# EAGLE board stm32103c8t6-v4 (EAGLE 7.3.0)
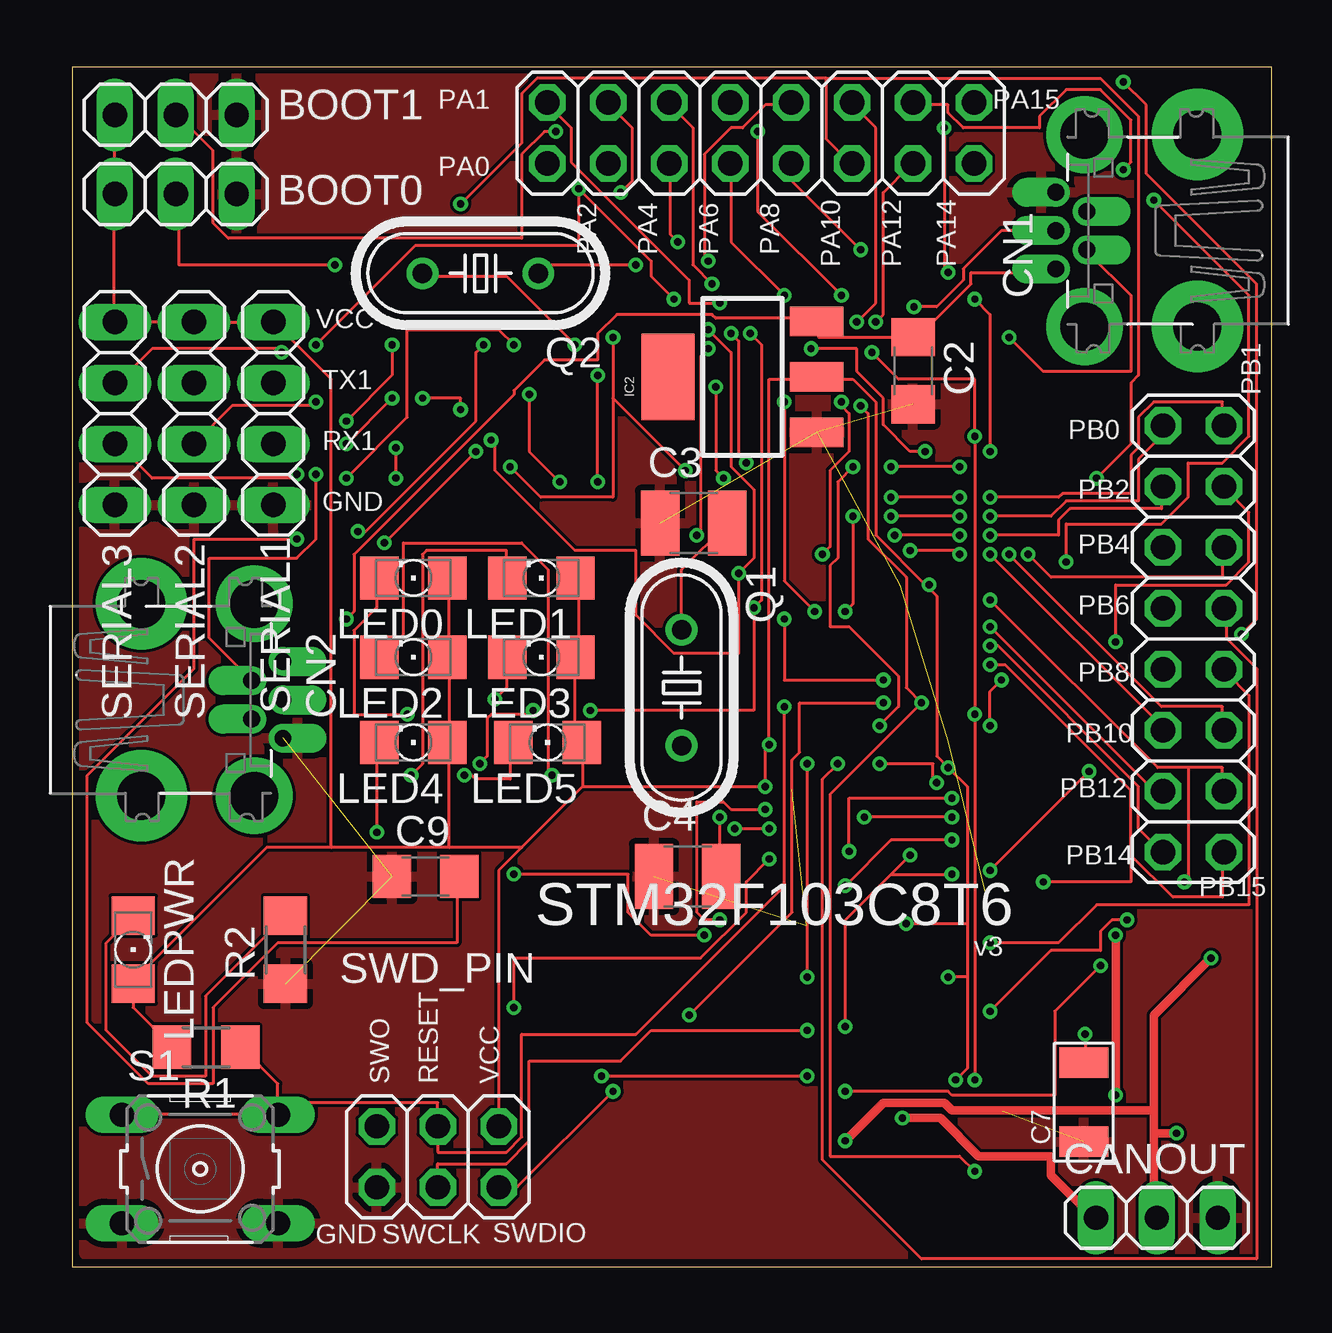
[diagram p0: board, top side]
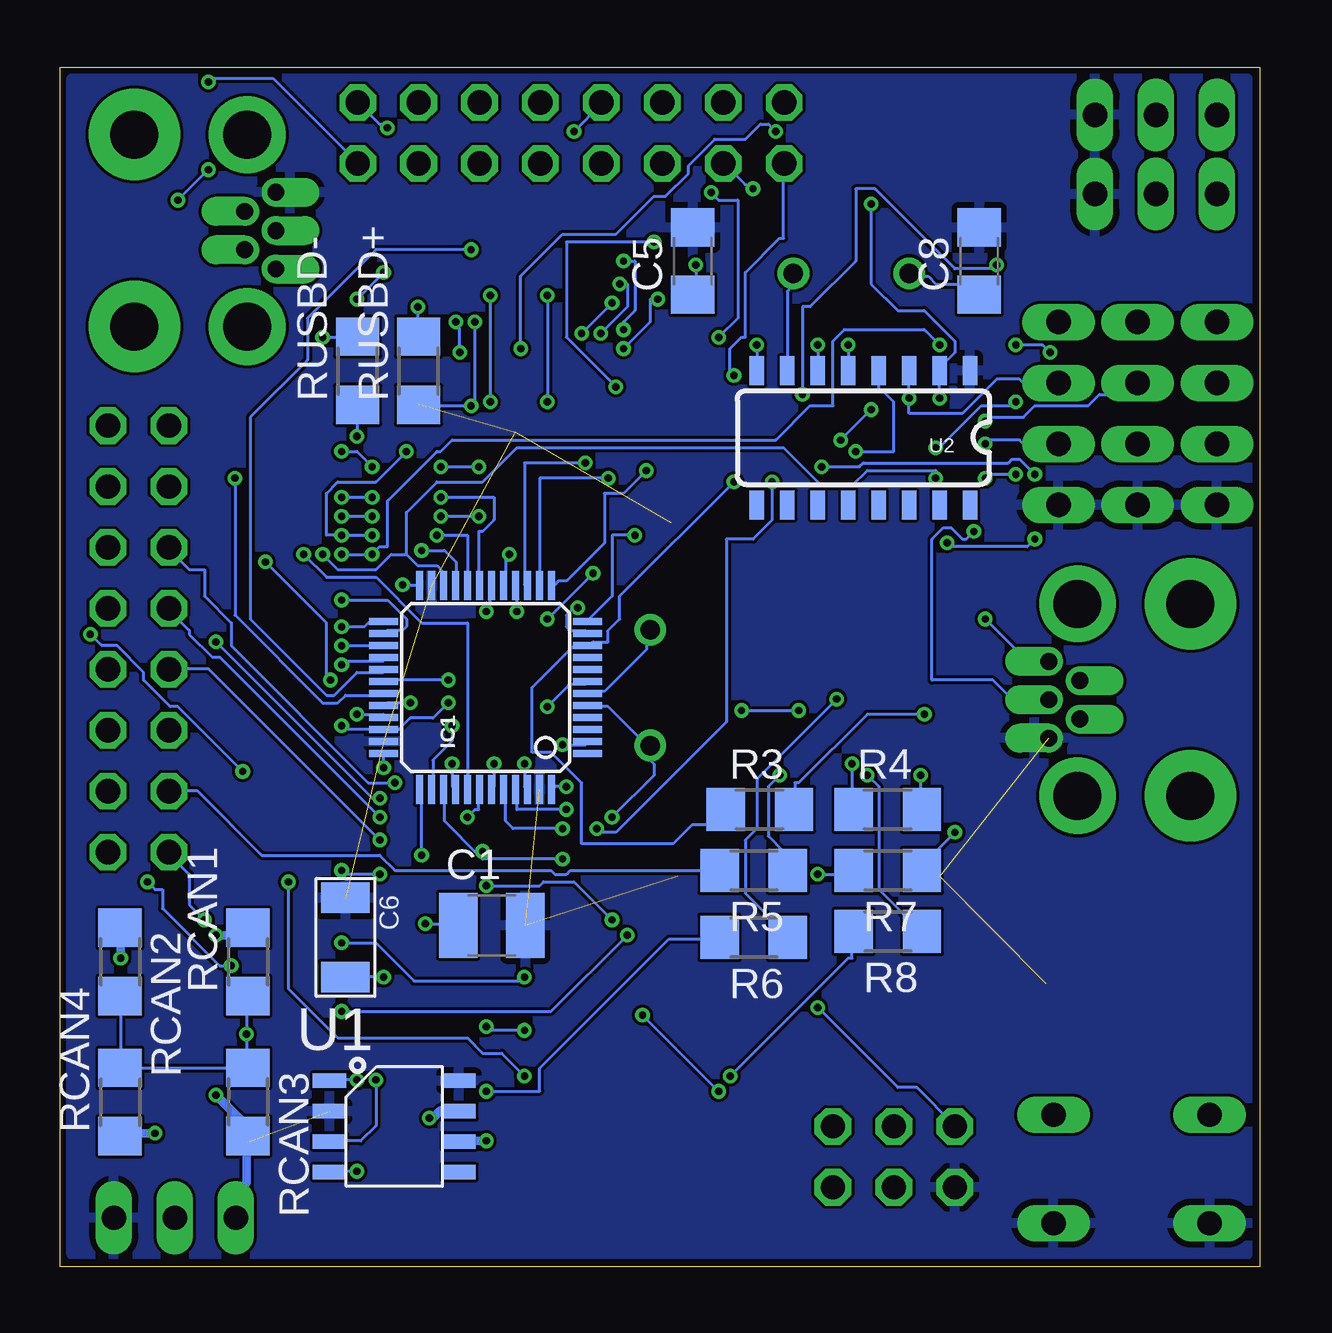
[diagram p1: board, bottom side, seen from below]

Size 50 x 50 mm. Coordinates in mm from the lower left corner, seen from the top.
Outline: 0,0 50,0 50,50 0,50 0,0
Copper layers (1*16): Top 0.035mm / dielectric 1.5mm / Bottom 0.035mm
Design rules "dirt_cheap_dirty_boards.v1": minimum track width 5mil, minimum drill 12mil, track to track 5mil, track to pad 5mil, pad to pad 5mil, via to via 5mil, smd to smd 0mil, copper to edge 10mil, drill to drill 10mil, minimum pad ring 10mil, minimum via ring 6mil, stop-mask expansion 2mil, vias tented up to drill 25mil, thermal gap 10mil
Net classes: 3 CAN: width 0.356 mm

## Footprints (pad centres in the part's own frame; a part is rotated, then mirrored left to right if it is on the bottom)
1X03 = drill 1.016 long: 1 -2.54,0; 2 0,0; 3 2.54,0
C1210 = smd 1.6 x 2.7: 1 -1.4,0; 2 1.4,0
C1206 = smd 1.6 x 1.8: 1 -1.4,0; 2 1.4,0
C1206' = smd 1.27 x 2.032: 1 -1.651,0; 2 1.651,0
USB-MINIB-THM = drill 0.7 offset: D+ 0,9.8; D- -0.8,8.5; GND 1.6,9.8; ID 0.8,8.5; VBUS -1.6,9.8 | drill 2 pad 3.81: GND1 -4,3.9; GND4 4,3.9 | drill 2 pad 3.2: GND2 -4,8.6; GND3 4,8.6
LQFP48 = smd 0.3 x 1.2: 1 -2.75,-4.25; 2 -2.25,-4.25; 3 -1.75,-4.25; 4 -1.25,-4.25; 5 -0.75,-4.25; 6 -0.25,-4.25; 7 0.25,-4.25; 8 0.75,-4.25; 9 1.25,-4.25; 10 1.75,-4.25; 11 2.25,-4.25; 12 2.75,-4.25; 25 2.75,4.25; 26 2.25,4.25; 27 1.75,4.25; 28 1.25,4.25; 29 0.75,4.25; 30 0.25,4.25; 31 -0.25,4.25; 32 -0.75,4.25; 33 -1.25,4.25; 34 -1.75,4.25; 35 -2.25,4.25; 36 -2.75,4.25 | smd 1.2 x 0.3: 13 4.25,-2.75; 14 4.25,-2.25; 15 4.25,-1.75; 16 4.25,-1.25; 17 4.25,-0.75; 18 4.25,-0.25; 19 4.25,0.25; 20 4.25,0.75; 21 4.25,1.25; 22 4.25,1.75; 23 4.25,2.25; 24 4.25,2.75; 37 -4.25,2.75; 38 -4.25,2.25; 39 -4.25,1.75; 40 -4.25,1.25; 41 -4.25,0.75; 42 -4.25,0.25; 43 -4.25,-0.25; 44 -4.25,-0.75; 45 -4.25,-1.25; 46 -4.25,-1.75; 47 -4.25,-2.25; 48 -4.25,-2.75
SOT223 = smd 1.219 x 2.235: 1 -2.311,-3.099; 2 0,-3.099; 3 2.311,-3.099 | smd 3.6 x 2.2: 4 0,3.099
1206 = smd 1.6 x 1.803: A -1.422,0; C 1.422,0
2X08 = drill 1.016 octagon: 1 -8.89,-1.27; 2 -8.89,1.27; 3 -6.35,-1.27; 4 -6.35,1.27; 5 -3.81,-1.27; 6 -3.81,1.27; 7 -1.27,-1.27; 8 -1.27,1.27; 9 1.27,-1.27; 10 1.27,1.27; 11 3.81,-1.27; 12 3.81,1.27; 13 6.35,-1.27; 14 6.35,1.27; 15 8.89,-1.27; 16 8.89,1.27
HC49/S = drill 0.813: 1 -2.413,0; 2 2.413,0
R1206 = smd 1.6 x 1.803: 1 -1.422,0; 2 1.422,0
B3F-10XX = drill 1.016 long: 1 -3.251,2.261; 2 3.251,2.261; 3 -3.251,-2.261; 4 3.251,-2.261
1X04 = drill 1.016 long: 1 -3.81,0; 2 -1.27,0; 3 1.27,0; 4 3.81,0
2X03 = drill 1.016 octagon: 1 -2.54,-1.27; 2 -2.54,1.27; 3 0,-1.27; 4 0,1.27; 5 2.54,-1.27; 6 2.54,1.27
SOIC8-6.0 = smd 0.6 x 1.4: 1 -1.905,-2.7; 2 -0.635,-2.7; 3 0.635,-2.7; 4 1.905,-2.7; 5 1.905,2.7; 6 0.635,2.7; 7 -0.635,2.7; 8 -1.905,2.7
SO016 = smd 0.6 x 1.2: 1 -4.445,-2.8; 2 -3.175,-2.8; 3 -1.905,-2.8; 4 -0.635,-2.8; 5 0.635,-2.8; 6 1.905,-2.8; 7 3.175,-2.8; 8 4.445,-2.8; 9 4.445,2.8; 10 3.175,2.8; 11 1.905,2.8; 12 0.635,2.8; 13 -0.635,2.8; 14 -1.905,2.8; 15 -3.175,2.8; 16 -4.445,2.8

## Placement (x,y rotation side)
BOOT0  [1X03]  4.32,44.7 0 top
BOOT1  [1X03]  4.32,48.01 0 top
C1  10nF  [C1210]  32,14.22 0 bottom
C2  10nF  [C1206]  35.05,37.34 270 top
C3  22pF  [C1210]  25.91,30.99 0 top
C4  22pF  [C1210]  25.65,16.26 0 top
C5  22pF  [C1206]  23.62,41.91 90 bottom
C6  100uF  [C1206']  38.1,13.72 270 bottom
C7  4.7uF  [C1206']  42.16,6.86 90 top
C8  22pF  [C1206]  11.68,41.91 90 bottom
C9  0.1uF  [C1206]  14.73,16.26 0 top
CANOUT  [1X03]  45.21,2.03 0 top
CN1  [USB-MINIB-THM]  50.8,43.18 90 top
CN2  [USB-MINIB-THM]  -1.02,23.62 270 top
IC1  STM32-M-48  [LQFP48]  32.26,24.13 90 bottom
IC2  [SOT223]  27.94,37.08 90 top
LED0  [1206]  14.22,28.7 180 top
LED1  [1206]  19.56,28.7 180 top
LED2  [1206]  14.22,25.4 180 top
LED3  [1206]  19.56,25.4 180 top
LED4  [1206]  14.22,21.84 180 top
LED5  [1206]  19.81,21.84 180 top
LEDPWR  [1206]  2.54,13.21 90 top
PORTA  [2X08]  28.7,47.24 0 top
PORTB  [2X08]  46.74,26.16 270 top
Q1  8MHz  [HC49/S]  25.4,24.13 270 top
Q2  12MHz  [HC49/S]  17.02,41.4 180 top
R1  10K  [R1206]  5.59,9.14 180 top
R2  10K  [R1206]  8.89,13.21 90 top
R3  10K  [R1206]  20.83,19.05 0 bottom
R4  10K  [R1206]  15.49,19.05 0 bottom
R5  10K  [R1206]  21.08,16.51 180 bottom
R6  10K  [R1206]  21.08,13.72 180 bottom
R7  10K  [R1206]  15.49,16.51 180 bottom
R8  10K  [R1206]  15.49,13.97 180 bottom
RCAN1  1K5  [R1206]  42.16,12.7 90 bottom
RCAN2  1K5  [R1206]  47.5,12.7 270 bottom
RCAN3  61  [R1206]  42.16,6.86 270 bottom
RCAN4  61  [R1206]  47.5,6.86 90 bottom
RUSBD+  22R  [R1206]  35.05,37.34 90 bottom
RUSBD-  22R  [R1206]  37.59,37.34 90 bottom
S1  [B3F-10XX]  5.33,4.06 0 top
SERIAL1  [1X04]  8.38,35.56 90 top
SERIAL2  [1X04]  5.08,35.56 90 top
SERIAL3  [1X04]  1.78,35.56 90 top
SWD_PIN  [2X03]  15.24,4.57 180 top
U1  MCP2551-SOIC8  [SOIC8-6.0]  36.07,5.84 270 bottom
U2  SN74HC251_SMD  [SO016]  16.51,34.54 180 bottom

## Library data of the parts
BOOT0 BOOT1 CANOUT PORTA PORTB SERIAL1-SERIAL3 SWD_PIN = pinhead
C1-C5 C8 C9 = rcl
C6 C7 = Discrete
CN1 CN2 = adafruit
IC1 = pel_stm32
IC2 = SparkFun-PowerIC
LED0 LED1-LED5 LEDPWR = led
Q1 Q2 = crystal; OC_FARNELL: 1667008; OC_NEWARK: unknown
R1-R8 RCAN1-RCAN4 RUSBD+ RUSBD- = resistor
S1 = switch-omron; MPN: B3F-1000; OC_FARNELL: 176432; OC_NEWARK: 36M3542
U1 = IC
U2 = SparkFun-DigitalIC

## Nets
BOOT0: BOOT0.2 IC1.44
BOOT1: BOOT1.2 IC1.20 PORTB.3
CANH [CAN]: CANOUT.1 RCAN1.2 RCAN3.2 U1.7
CANL [CAN]: CANOUT.2 RCAN2.1 RCAN4.1 U1.6
CANRX: IC1.32 PORTA.12 RUSBD+.1 U1.4
CANTX: IC1.33 PORTA.13 RUSBD-.1 U1.1
D+: CN1.D+ RUSBD+.2
D+CHG: CN2.D+ U2.5
D-: CN1.D- RUSBD-.2
D-CHG: CN2.D- U2.6
GND [GND]: BOOT0.3 BOOT1.3 C1.2 C2.2 C3.1 C4.1 C5.2 C6.1 C7.1 C8.2 C9.1 CANOUT.3 CN1.GND CN2.GND IC1.23 IC1.35 IC1.47 IC2.1 R2.1 S1.3 S1.4 SERIAL1.1 SERIAL2.1 SERIAL3.1 SWD_PIN.6 U1.2 U1.8 U2.1
N$1: IC2.4
N$2: LED0.C R3.2
N$3: LED1.C R4.2
N$4: LEDPWR.C R2.2
N$5: IC1.3
N$6: LED2.C R5.1
N$7: LED3.C R6.1
N$8: LED4.C R7.1
N$9: LED5.C R8.1
N$11: C9.2 U2.4
N$13: CN2.ID
OSCIN: C4.2 IC1.5 Q1.2
OSCOUT: C3.2 IC1.6 Q1.1
PA0: IC1.10 PORTA.1 R3.1
PA1: IC1.11 PORTA.2 R4.1
PA4: IC1.14 PORTA.5
PA5: IC1.15 PORTA.6
PA6: IC1.16 PORTA.7
PA7: IC1.17 PORTA.8
PA8: IC1.29 PORTA.9
PA15: IC1.38 PORTA.16
PB0: IC1.18 PORTB.1
PB1: IC1.19 PORTB.2
PB4: IC1.40 PORTB.5
PB5: IC1.41 PORTB.6
PB6: IC1.42 PORTB.7
PB7: IC1.43 PORTB.8
PB8: IC1.45 PORTB.9
PB9: IC1.46 PORTB.10
PB10: IC1.21 PORTB.11 SERIAL2.3
PB12: IC1.25 PORTB.13 R5.2
PB13: IC1.26 PORTB.14 R6.2
PB14: IC1.27 PORTB.15 R7.2
PB15: IC1.28 PORTB.16 R8.2
RESET: IC1.7 R1.1 S1.1 S1.2 SWD_PIN.3
RX1: IC1.31 PORTA.11 SERIAL1.2 U2.2
RX2: IC1.13 PORTA.4 SERIAL3.2
RX3: IC1.22 PORTB.12 SERIAL2.2
SWCLK: IC1.37 PORTA.15 SWD_PIN.4
SWDIO: IC1.34 PORTA.14 SWD_PIN.2
SWO: IC1.39 PORTB.4 SWD_PIN.5
TX1: IC1.30 PORTA.10 SERIAL1.3 U2.3
TX2: IC1.12 PORTA.3 SERIAL3.3
UNIC: C7.2 RCAN1.1 RCAN2.2 RCAN3.1 RCAN4.2
VBUS: C2.1 CN1.VBUS CN2.VBUS IC2.3
VCC [POWER]: BOOT0.1 BOOT1.1 C1.1 C6.2 IC1.2 IC1.24 IC1.36 IC1.48 IC2.2 LED0.A LED1.A LED2.A LED3.A LED4.A LED5.A LEDPWR.A R1.2 SERIAL1.4 SERIAL2.4 SERIAL3.4 SWD_PIN.1 U1.3
VCCINT [POWER]: U2.16
XI7: C5.1 Q2.1 U2.7
XI8: C8.1 Q2.2 U2.8

## Tracks (layer width: path | path; a pad name or v marks a point on that pad's centre or on a via)
BOOT0  (via drill 0.3)
  Top 0.127: v27.62,18.26 v29.05,18.26 | v20.32,32.7 19.05,33.97 v19.05,36.35 | v10.95,41.75 4.45,41.75 4.45,44.61 BOOT0.2
  Bottom 0.127: v29.05,18.26 31.11,18.26 31.43,18.57 31.43,19.84 IC1.44 | v27.62,18.26 27.46,18.1 26.83,18.1 22.23,22.7 22.23,30.32 21.11,30.32 20.32,31.11 v20.32,32.7 | v19.05,36.35 19.05,40.01 18.73,40.01 16.83,41.91 16.83,44.93 16.03,44.93 12.7,41.59 11.11,41.59 v10.95,41.75
BOOT1  (via drill 0.3)
  Top 0.127: v36.99,30.48 v34.29,30.48 | v38.26,30.48 41.12,30.48 41.12,31.11 41.59,31.59 45.4,31.59 45.4,32.38 PORTB.3 | v20.16,47.31 19.68,47.31 18.73,46.35 18.73,42.86 6.51,42.86 5.87,43.5 5.87,46.51 4.45,47.94 BOOT1.2 | v30.8,38.26 32.7,38.26 32.7,37.31 33.81,36.2 33.81,35.08 34.92,33.97 v35.56,33.97
  Bottom 0.127: v34.29,30.48 33.02,30.48 33.02,28.42 IC1.20 | v36.99,30.48 v38.26,30.48 38.89,30.48 38.89,32.23 38.42,32.7 36.83,32.7 v35.56,33.97 | v20.16,47.31 20.48,47.62 20.8,47.62 21.43,46.99 22.7,46.99 23.81,45.88 23.81,45.56 24.77,44.61 25.24,44.61 26.83,43.02 29.05,43.02 30.8,41.27 v30.8,38.26
CANH  (via drill 0.3)
  Top 0.356: v34.61,6.19 36.2,6.19 37.78,4.6 40.8,4.6 40.8,3.81 42.55,2.06 CANOUT.1 | v43.5,7.14 v43.5,13.81
  Bottom 0.356: v34.61,6.19 34.45,6.19 34.13,6.51 33.5,6.51 U1.7 | CANOUT.1 42.55,2.06 42.55,3.17 42.23,3.49 42.23,5.4 RCAN3.2 42.23,5.56 42.23,5.87 v43.5,7.14 | v43.5,13.81 42.39,13.81 42.23,13.97 RCAN1.2
CANL  (via drill 0.3)
  Top 0.356: v32.23,5.24 33.81,6.83 36.35,6.83 36.67,6.51 45.09,6.51 | 45.09,5.56 45.09,2.06 CANOUT.2 | 45.09,5.56 45.09,6.51 | 45.09,5.56 v46.04,5.56 | v47.47,12.86 45.09,10.48 45.09,6.51
  Bottom 0.356: v32.23,5.24 33.34,5.24 U1.6 | v46.04,5.56 47.47,5.56 RCAN4.1 | v47.47,12.86 47.47,13.97 RCAN2.1
CANRX  (via drill 0.3)
  Top 0.127: v32.86,35.88 33.18,35.56 33.18,30.32 34.77,28.73 34.77,24.13 v35.4,23.5 31.59,19.68 31.59,4.6 36.99,4.6 v37.62,3.97 | v32.7,39.37 33.5,40.16 33.5,47.47 32.54,48.42 PORTA.12
  Bottom 0.127: v35.4,23.5 36.35,23.5 IC1.32 | RUSBD+.1 34.92,35.88 v32.86,35.88 32.7,35.88 v32.7,39.37 | v37.62,3.97 38.73,3.97 U1.4
CANTX  (via drill 0.3)
  Top 0.127: v37.62,7.78 v37.62,23.02 v37.62,34.61 37.62,36.99 34.45,36.99 v33.34,38.1 | v33.5,39.37 33.81,39.69 33.81,44.77 34.92,45.88 PORTA.13
  Bottom 0.127: v37.62,23.02 36.51,23.02 IC1.33 | v37.62,34.61 37.62,35.88 RUSBD-.1 | v37.62,7.78 38.73,7.78 U1.1 | v33.5,39.37 33.34,39.21 v33.34,38.1
D+  (via drill 0.3)
  Top 0.127: v35.08,40.01 36.04,40.01 37.15,41.12 37.15,41.59 38.73,43.18 CN1.D+
  Bottom 0.127: v35.08,40.01 35.08,38.89 RUSBD+.2
D+CHG  (via drill 0.3)
  Top 0.127: v17.14,38.42 16.83,38.1 16.83,35.24 12.22,30.64 v11.91,30.64
  Bottom 0.127: v17.14,38.42 U2.5 | v11.91,30.64 12.22,30.32 12.38,30.32 12.86,30.8 13.18,30.8 13.65,30.32 13.65,24.45 11.11,24.45 10.32,23.65 8.89,23.65 CN2.D+
D-  (via drill 0.3)
  Top 0.127: v39.05,38.73 40.48,37.31 44.13,37.31 44.13,40.48 42.39,42.23 CN1.D-
  Bottom 0.127: v39.05,38.73 37.62,38.73 RUSBD-.2
D-CHG  (via drill 0.3)
  Top 0.127: v18.41,38.42 17.78,39.05 13.97,39.05 13.97,35.4 v11.43,32.86 | v10.16,33.02 10.16,30.32 9.37,29.53 5.71,29.53 5.71,26.19 7.46,24.45 CN2.D-
  Bottom 0.127: v18.41,38.42 U2.6 | v11.43,32.86 11.27,33.02 v10.16,33.02
GND  (10 unrouted)
  pour Bottom: 0.51,0.51 49.53,0.51 49.53,49.53 0.51,49.53
  pour Top: 0.51,0.51 0.51,49.53 49.53,49.53 49.53,0.51
N$2  (via drill 0.3)
  Top 0.127: v13.97,23.02 11.75,23.02 11.75,26.51 12.7,27.46 12.7,28.57 LED0.C
  Bottom 0.127: v13.97,23.02 16.35,23.02 19.21,20.16 19.37,20.16 19.37,19.05 R3.2
N$3  (via drill 0.3)
  Top 0.127: v14.13,20.48 14.61,20.95 14.61,29.69 14.76,29.84 18.1,29.84 18.1,28.73 LED1.C
  Bottom 0.127: v14.13,20.48 14.13,19.05 R4.2
N$4
  Top 0.127: LEDPWR.C 2.54,14.61 1.43,13.49 1.43,9.84 3.33,7.94 5.56,7.94 5.56,11.27 8.89,14.61 R2.2
N$6  (via drill 0.3)
  Top 0.127: v20,20.48 19.84,20.64 19.84,29.05 18.73,30.16 13.81,30.16 13.81,26.35 12.86,25.4 LED2.C
  Bottom 0.127: v20,20.48 20.48,20 20.48,17.94 19.84,17.3 19.68,17.3 19.68,16.51 R5.1
N$7  (via drill 0.3)
  Top 0.127: v17.62,23.65 18.1,24.13 18.1,25.4 LED3.C
  Bottom 0.127: v17.62,23.65 20.95,20.32 20.95,18.26 21.43,17.78 21.43,15.56 19.68,13.81 R6.1
N$8  (via drill 0.3)
  Top 0.127: v12.7,18.1 12.7,21.75 LED4.C
  Bottom 0.127: v12.7,18.1 13.49,17.3 13.97,17.3 13.97,16.51 R7.1
N$9  (via drill 0.3)
  Top 0.127: v16.35,20.48 16.67,20.48 16.83,20.32 18.26,20.32 18.26,21.75 LED5.C
  Bottom 0.127: v16.35,20.48 15.88,20 15.88,15.72 14.13,13.97 R8.1
N$11  (via drill 0.3)
  Top 0.127: v13.02,30.16 v16.83,33.97 | v9.37,30.32 5.08,30.32 5.08,24.92 0.64,20.48 0.64,10.16 3.17,7.62 5.87,7.62 5.87,10.79 8.57,13.49 16.03,13.49 16.03,16.19 C9.2
  Bottom 0.127: U2.4 15.88,36.51 15.72,36.51 15.24,36.04 15.24,33.97 v16.83,33.97 | v13.02,30.16 12.86,30 9.68,30 v9.37,30.32
OSCIN  (via drill 0.3)
  Top 0.127: v26.99,18.73 26.99,16.35 C4.2
  Bottom 0.127: IC1.5 27.94,23.34 27.15,23.34 25.56,21.75 25.4,21.75 Q1.2 25.4,21.11 25.24,20.95 25.24,20.48 v26.99,18.73
OSCOUT
  Top 0.127: Q1.1 25.4,29.05 27.3,30.96 C3.2
  Bottom 0.127: IC1.6 27.94,23.97 27.3,23.97 25.56,25.72 25.56,26.51 25.4,26.51 Q1.1
PA0  (via drill 0.3)
  Top 0.127: v21.91,32.7 v21.91,37.15
  Bottom 0.127: R3.1 22.38,19.05 23.02,18.41 23.65,18.41 24.45,17.62 28.26,17.62 28.26,20.16 29.53,21.43 30.32,21.43 30.32,24.13 28.57,25.88 28.1,25.88 IC1.10 27.94,25.88 27.78,26.04 27.15,26.04 27.15,26.51 26.67,26.99 26.67,27.94 v21.91,32.7 | v21.91,37.15 22.07,37.15 22.07,38.26 21.59,38.73 21.43,38.73 21.43,41.43 20,42.86 19.84,42.86 19.84,45.88 PORTA.1
PA1  (via drill 0.3)
  Top 0.127: v28.26,38.89 28.73,38.42 28.73,27.78 v28.42,27.46 28.42,23.18 v21.59,23.18 | v26.99,40.16 25.72,40.16 25.72,41.12 20.8,46.04 20.8,47.47 19.84,48.42 PORTA.2 | v16.99,20.95 17.3,21.27 17.3,22.86 17.46,23.02 19.21,23.02 v19.21,23.18
  Bottom 0.127: v28.42,27.46 28.57,27.46 28.89,27.15 28.89,26.67 28.73,26.51 28.1,26.51 IC1.11 | v26.99,40.16 v28.26,38.89 | v16.99,20.95 16.99,19.05 R4.1 | v21.59,23.18 v19.21,23.18
PA4  (via drill 0.3)
  Top 0.127: v27.15,32.86 26.83,33.18 v26.83,36.67 | v25.24,42.7 24.92,43.02 24.92,45.88 PORTA.5
  Bottom 0.127: v27.15,32.86 30,32.86 30,28.42 IC1.14 | v26.83,36.67 28.89,38.73 28.89,42.7 v25.24,42.7
PA5  (via drill 0.3)
  Top 0.127: v28.1,33.5 27.78,33.81 27.78,38.58 v27.46,38.89 | v26.67,40.96 25.88,41.75 25.88,47.47 24.92,48.42 PORTA.6
  Bottom 0.127: v28.1,33.5 30.64,33.5 30.64,28.42 IC1.15 | v27.46,38.89 26.35,40.01 26.35,40.96 v26.67,40.96
PA6  (via drill 0.3)
  Top 0.127: v30.96,27.3 29.69,28.57 v29.69,36.04 | v29.69,40.48 27.46,42.7 27.46,45.88 PORTA.7
  Bottom 0.127: v30.96,27.3 30.96,28.26 IC1.16 | v29.69,40.48 v29.69,36.04
PA7  (via drill 0.3)
  Top 0.127: v31.27,29.69 31.59,30 31.59,33.18 32.38,33.97 32.38,35.56 32.07,35.88 v32.07,36.04 | v32.07,40.48 28.57,43.97 v28.57,47.31
  Bottom 0.127: v31.27,29.69 31.43,29.69 31.43,28.42 IC1.17 | v32.07,40.48 v32.07,36.04 | v28.57,47.31 27.46,48.42 PORTA.8
PA8  (via drill 0.3)
  Top 0.127: v32.86,42.39 30,45.24 30,45.88 PORTA.9
  Bottom 0.127: v32.86,42.39 36.83,42.39 39.69,39.53 39.69,37.78 42.07,35.4 42.07,26.99 38.89,23.81 38.58,23.81 37.62,24.77 36.51,24.77 IC1.29
PA15  (via drill 0.3)
  Top 0.127: v33.66,22.54 34.45,23.34 34.45,24.61 32.38,26.67 31.59,26.67 31.59,29.21 31.91,29.53 31.91,32.7 v32.54,33.34 | v36.99,33.34 v34.13,33.34 | v38.26,33.97 38.26,39.69 v37.62,40.32 | v36.51,41.43 36.35,41.59 v36.35,47.47
  Bottom 0.127: v33.66,22.54 33.66,21.91 34.45,21.11 34.45,20 IC1.38 | v34.13,33.34 v32.54,33.34 | v36.99,33.34 37.62,33.97 v38.26,33.97 | v36.51,41.43 v37.62,40.32 | v36.35,47.47 36.51,47.62 36.67,47.62 37.47,48.42 PORTA.16
PB0  (via drill 0.3)
  Top 0.127: v32.23,27.3 32.54,27.62 v32.54,31.27 | v36.99,31.27 v34.13,31.27 | v38.26,31.27 40.8,31.27 41.43,31.91 44.45,31.91 44.45,33.66 45.4,34.61 45.4,34.92 PORTB.1
  Bottom 0.127: v32.23,27.3 32.07,27.3 32.07,28.26 IC1.18 | v34.13,31.27 v32.54,31.27 | v38.26,31.27 v36.99,31.27
PB1  (via drill 0.3)
  Top 0.127: v36.99,32.07 v34.13,32.07 | v38.26,32.07 41.12,32.07 41.27,32.23 44.13,32.23 44.13,33.81 44.45,34.13 44.45,35.4 45.09,36.04 47.94,36.04 47.94,35.08 PORTB.2
  Bottom 0.127: v34.13,32.07 31.91,32.07 31.91,31.11 32.38,30.64 32.54,30.64 32.54,28.42 IC1.19 | v38.26,32.07 v36.99,32.07
PB4  (via drill 0.3)
  Top 0.127: v33.66,20.95 35.88,20.95 35.88,20.32 v36.04,20.16
  Bottom 0.127: v33.66,20.95 33.66,20 IC1.40 | v36.04,20.16 37.15,20.16 42.86,25.88 42.86,26.83 43.97,27.94 43.97,29.05 44.61,29.05 45.4,29.84 PORTB.5
PB5  (via drill 0.3)
  Top 0.127: v39.85,29.69 40.8,28.73 47.94,28.73 47.94,29.84 PORTB.6
  Bottom 0.127: v39.85,29.69 38.89,28.73 36.83,28.73 34.92,26.83 33.02,26.83 33.02,20 IC1.41
PB6  (via drill 0.3)
  Top 0.127: v36.67,18.73 v33.02,18.73
  Bottom 0.127: v33.02,18.73 32.7,19.05 32.54,19.05 32.54,19.84 IC1.42 | v36.67,18.73 43.34,25.4 43.66,25.4 44.61,26.35 44.61,26.51 45.4,27.3 PORTB.7
PB7  (via drill 0.3)
  Top 0.127: v31.91,20.95 31.27,20.32 31.27,4.45 35.4,0.32 49.37,0.32 49.37,24.92 48.1,26.19 48.1,27.3 PORTB.8
  Bottom 0.127: v31.91,20.95 31.91,20 IC1.43
PB8  (via drill 0.3)
  Top 0.127: v28.89,19.05 27.46,19.05 27.15,19.37 26.04,19.37 26.04,14.76 26.35,14.45 v26.99,14.45 | v32.23,15.88 34.13,17.78 v36.67,17.78
  Bottom 0.127: v28.89,19.05 30.96,19.05 30.96,19.84 IC1.45 | v26.99,14.45 28.57,16.03 29.84,16.03 30,15.88 v32.23,15.88 | v36.67,17.78 43.81,24.92 45.4,24.92 PORTB.9
PB9  (via drill 0.3)
  Top 0.127: v30.64,12.06 v30.64,20.95 | v38.26,13.49 41.12,13.49 42.7,15.08 49.05,15.08 49.05,23.81 48.1,24.77 PORTB.10
  Bottom 0.127: v30.64,20.95 30.64,20 IC1.46 | v30.64,12.06 30.8,11.91 35.24,11.91 36.83,13.49 v38.26,13.49
PB10  (via drill 0.3)
  Top 0.127: v34.92,29.84 36.99,29.84 v36.99,29.69 | v38.26,29.69 45.4,22.54 45.4,22.38 PORTB.11 | v11.43,35.24 13.34,37.15 v13.34,38.42
  Bottom 0.127: v34.92,29.84 33.97,29.84 33.5,29.37 33.5,28.42 IC1.21 | v38.26,29.69 v36.99,29.69 36.67,30 36.35,30 36.35,31.91 34.29,33.97 34.13,33.97 33.66,34.45 20.16,34.45 18.73,35.88 17.78,35.88 17.78,38.58 17.3,39.05 13.97,39.05 v13.34,38.42 | SERIAL2.3 5.56,36.35 6.67,36.35 7.14,35.88 9.37,35.88 9.84,35.4 11.27,35.4 v11.43,35.24
PB12  (via drill 0.3)
  Top 0.127: v38.26,26.67 45.09,19.84 45.4,19.84 PORTB.13
  Bottom 0.127: v38.26,26.67 37.31,26.67 37.15,26.83 36.51,26.83 IC1.25 | R5.2 28.73,16.51 28.89,16.35 29.37,16.35 29.53,16.51 36.04,16.51 36.67,17.14 41.59,17.14 44.29,19.84 45.4,19.84 PORTB.13
PB13  (via drill 0.3)
  Top 0.127: v38.26,27.78 45.24,20.8 46.51,20.8 | 46.51,20.8 47.94,20.8 47.94,19.84 PORTB.14 | v32.23,7.3 36.51,7.3 36.67,7.14 40.96,7.14 40.96,10.64 v42.86,12.54 | v46.35,16.03 46.51,16.19 46.51,20.8
  Bottom 0.127: v38.26,27.78 36.35,27.78 35.56,26.99 35.56,26.67 35.72,26.51 36.35,26.51 IC1.26 | v32.23,7.3 30,7.3 30,8.26 24.61,13.65 22.54,13.65 R6.2 | v42.86,12.54 43.34,12.54 45.72,14.92 45.72,15.72 46.04,15.72 v46.35,16.03
PB14  (via drill 0.3)
  Top 0.127: v38.26,25.88 38.58,25.88 44.45,20 44.45,18.26 45.4,17.3 PORTB.15 | v18.41,16.35 23.18,16.35 23.18,14.76 24.13,13.81 v26.35,13.81 | v38.26,10.64 40.8,13.18 42.86,13.18 42.86,13.97 43.34,14.45 v43.97,14.45
  Bottom 0.127: v38.26,25.88 IC1.27 | v18.41,16.35 17.14,16.35 16.99,16.51 R7.2 | v26.35,13.81 29.53,10.64 v38.26,10.64 | v43.97,14.45 44.61,15.08 44.61,16.35 45.4,17.14 PORTB.15
PB15  (via drill 0.3)
  Top 0.127: v38.26,25.08 38.89,25.08 44.13,19.84 44.13,17.14 | 44.13,17.14 45.88,15.4 47.94,15.4 47.94,17.14 PORTB.16 | v30.64,7.94 v22.07,7.94 | v40.48,16.03 44.13,16.03 44.13,17.14
  Bottom 0.127: v38.26,25.08 38.1,25.24 36.51,25.24 IC1.28 | v22.07,7.94 17.14,12.86 16.99,12.86 16.99,13.97 R8.2 | v30.64,7.94 31.59,8.89 32.38,8.89 33.02,9.53 38.42,9.53 40.48,11.59 v40.48,16.03
RESET  (via drill 0.3)
  Top 0.127: 8.57,6.35 8.57,6.83 | 8.57,6.83 8.57,7.62 7.14,9.05 R1.1 | 8.57,6.35 2.22,6.35 S1.1 | 8.57,6.35 S1.2 8.57,6.83 | v29.69,23.34 29.69,15.88 23.5,9.68 18.73,9.68 18.73,5.4 18.1,4.76 15.24,4.76 SWD_PIN.3 15.24,6.83 8.57,6.83
  Bottom 0.127: v29.69,23.34 28.73,24.29 28.1,24.29 IC1.7
RX1  (via drill 0.3)
  Top 0.127: v11.43,34.29 v13.34,36.2 | v42.7,32.86 44.13,34.29 44.13,36.83 44.45,37.15 44.45,47.94 42.86,49.53 31.43,49.53 | 31.43,49.53 31.43,46.99 32.38,46.04 PORTA.11 | v16.19,44.29 18.73,46.83 18.73,48.9 19.37,49.53 31.43,49.53
  Bottom 0.127: v13.34,36.2 U2.2 13.34,37.47 12.7,38.1 12.7,38.58 13.97,39.85 15.08,39.85 16.19,40.96 v16.19,44.29 | v11.43,34.29 11.27,34.45 10,34.45 9.84,34.29 SERIAL1.2 | v42.7,32.86 42.7,27.15 39.05,23.5 38.42,23.5 38.1,23.81 36.51,23.81 IC1.31
RX2  (via drill 0.3)
  Top 0.127: 22.54,36.2 v25.56,33.18 | v22.54,38.73 22.54,36.2 | v22.86,44.77 23.34,45.24 23.34,47.47 22.38,48.42 PORTA.4 | v9.37,33.02 9.37,32.86 3.33,32.86 1.91,34.29 SERIAL3.2 | v18.26,33.34 19.53,32.07 22.54,32.07 22.54,36.2
  Bottom 0.127: v25.56,33.18 26.51,32.23 27.3,32.23 27.3,30.16 28.89,28.57 29.21,28.57 29.37,28.42 IC1.13 | v22.54,38.73 21.75,39.53 21.75,44.45 22.54,44.45 v22.86,44.77 | v9.37,33.02 10,33.66 10.32,33.66 10.48,33.5 16.51,33.5 16.67,33.34 v18.26,33.34
RX3  (via drill 0.3)
  Top 0.127: v39.05,29.69 45.4,23.34 47.94,23.34 47.94,22.38 PORTB.12 | SERIAL2.2 6.67,35.88 10.16,35.88 v10.16,36.04 | v13.49,32.86 v13.49,34.13
  Bottom 0.127: 35.56,29.69 35.08,29.21 34.29,29.21 33.97,28.89 33.97,28.42 IC1.22 | 35.56,29.69 36.2,29.69 36.83,29.05 38.42,29.05 v39.05,29.69 | v10.16,36.04 10.32,35.88 11.59,35.88 13.34,34.13 v13.49,34.13 | v13.49,32.86 13.49,33.18 16.35,33.18 16.99,32.54 18.26,32.54 19.84,34.13 30.96,34.13 32.38,32.7 34.29,32.7 35.56,31.43 35.56,29.69
SWCLK  (via drill 0.3)
  Top 0.127: 34.13,16.35 32.23,14.45 v32.23,10 | 34.13,16.35 v34.92,17.14 | v30.64,9.84 24.13,9.84 22.86,8.57 19.05,8.57 19.05,5.24 18.1,4.29 15.24,4.29 SWD_PIN.4 | v43.81,49.37 44.77,48.42 44.77,45.56 49.37,40.96 49.37,26.99 v48.74,26.35 | v38.26,16.51 v42.39,20.64 | 34.13,16.35 v36.67,16.35
  Bottom 0.127: v34.92,17.14 34.92,19.84 IC1.37 | v32.23,10 32.07,9.84 v30.64,9.84 | v43.81,49.37 43.66,49.53 41.12,49.53 37.62,46.04 PORTA.15 | v48.74,26.35 48.26,25.88 47.62,25.88 46.51,24.77 46.51,24.45 45.4,23.34 45.09,23.34 v42.39,20.64 | v38.26,16.51 38.1,16.35 v36.67,16.35
SWDIO  (via drill 0.3)
  Top 0.127: v33.81,23.5 30.32,23.5 30.32,21.43 30,21.11 30,14.76 v25.72,10.48 | v22.54,7.3 18.57,3.33 17.78,3.33 SWD_PIN.2 | v43.81,45.72 44.13,46.04 44.13,47.78 42.86,49.05 41.43,49.05 40.32,47.94 40.32,47.47 37.15,47.47 36.51,48.1 36.51,48.42 35.08,48.42 PORTA.14 | v45.09,44.45 49.05,40.48 49.05,34.61 47.94,33.5 46.51,33.5 46.51,32.07 45.4,30.96 41.43,30.96 v41.43,29.37 | v38.73,24.45 38.26,23.97 v38.26,22.54
  Bottom 0.127: v33.81,23.5 34.45,22.86 35.4,22.86 35.88,22.38 36.35,22.38 IC1.34 38.1,22.38 v38.26,22.54 | v22.54,7.3 v25.72,10.48 | v45.09,44.45 v43.81,45.72 | v41.43,29.37 38.89,26.83 38.89,24.45 v38.73,24.45
SWO  (via drill 0.3)
  Top 0.127: v29.05,16.99 28.1,16.03 28.1,14.76 26.19,12.86 18.41,12.86 v18.41,10.79 | v43.5,26.04 43.5,28.42 48.1,28.42 49.05,29.37 49.05,31.43 48.1,32.38 PORTB.4 | v36.67,19.53 32.38,19.53 v32.38,17.3
  Bottom 0.127: 32.54,17.14 32.38,16.99 v29.05,16.99 | 32.54,17.14 33.97,18.57 33.97,19.84 IC1.39 | v18.41,10.79 15.08,7.46 14.29,7.46 12.7,5.87 SWD_PIN.5 | v43.5,26.04 36.99,19.53 v36.67,19.53 | 32.54,17.14 v32.38,17.3
TX1  (via drill 0.3)
  Top 0.127: v33.81,24.45 29.69,24.45 v29.69,26.99 | v26.51,39.05 27.46,38.1 27.46,33.34 28.42,32.38 28.42,29.53 v27.78,28.89 27.78,25.56 25.08,25.56 23.5,27.15 23.5,29.84 20.95,29.84 17.62,33.18 17.62,34.29 v17.46,34.45 | v26.51,41.91 26.35,42.07 26.35,46.35 27.46,47.47 27.94,47.47 28.89,48.42 29.84,48.42 PORTA.10 | v14.61,36.2 16.19,36.2 v16.19,35.72
  Bottom 0.127: U2.3 v14.61,36.2 14.61,35.56 12.38,35.56 10.95,36.99 10,36.99 9.84,36.83 SERIAL1.3 | v33.81,24.45 36.35,24.45 IC1.30 | v27.78,28.89 v29.69,26.99 | v26.51,39.05 26.51,39.37 26.04,39.85 26.04,41.91 v26.51,41.91 | v17.46,34.45 v16.19,35.72
TX2  (via drill 0.3)
  Top 0.127: v26.04,30.48 26.19,30.64 26.19,37.94 v26.51,38.26 | v25.08,40.32 24.13,41.27 24.13,41.91 v21.11,44.93 21.11,42.55 14.29,42.55 v10.16,38.42 | v8.73,38.1 8.73,38.26 3.33,38.26 1.91,36.83 SERIAL3.3
  Bottom 0.127: v26.04,30.48 26.99,30.48 26.99,27.94 27.94,26.99 IC1.12 | v26.51,38.26 25.4,39.37 25.4,40.32 v25.08,40.32 | v21.11,44.93 21.27,45.09 21.43,45.09 22.23,45.88 PORTA.3 | v8.73,38.1 9.05,38.42 v10.16,38.42
UNIC  (via drill 0.3)
  Top 0.127: v42.23,9.68 42.23,8.57 C7.2
  Bottom 0.127: RCAN2.2 47.47,11.27 47.47,8.41 RCAN4.2 47.47,8.26 42.23,8.26 RCAN3.1 42.23,8.41 v42.23,9.68 42.23,11.27 RCAN1.1
VBUS  (via drill 0.3)
  Top 0.127: v11.43,26.99 11.75,27.3 11.75,29.69 18.41,36.35 18.41,36.51 19.68,37.78 21.91,37.78 21.91,38.89 22.7,39.69 26.67,39.69 26.83,39.53 30.96,39.53 IC2.3 31.11,39.37 31.11,38.73 34.92,38.73 C2.1 35.08,38.89 35.4,38.89 37.47,40.96 37.47,41.43 40.96,41.43 CN1.VBUS
  Bottom 0.127: v11.43,26.99 10.16,25.72 9.37,25.72 8.89,25.24 CN2.VBUS
VCC  (via drill 0.3)
  Top 0.127: 35.56,28.42 33.5,30.48 33.5,36.04 32.54,36.99 31.11,36.99 IC2.2 30.96,36.99 29.05,36.99 v29.05,21.75 28.89,21.59 v28.89,20 21.27,20 | 35.56,28.42 36.04,27.94 36.04,21.27 v36.51,20.8 37.31,20 37.31,14.29 | 35.56,28.42 v35.72,28.42 | v36.83,7.78 37.31,8.26 37.31,12.06 | 37.31,14.29 37.31,12.06 | 37.31,12.06 v36.51,12.06 | 37.31,14.29 v34.77,14.29 | BOOT1.1 1.75,47.94 1.75,44.77 BOOT0.1 1.75,44.61 1.75,39.37 SERIAL3.4 SERIAL2.4 SERIAL1.4 8.41,39.37 10.79,36.99 10.79,17.46 | 15.72,25.4 15.72,21.91 LED4.A 15.72,21.75 15.72,17.46 | 15.72,25.4 15.72,28.57 LED0.A | 15.72,25.4 LED2.A | R1.2 4.13,9.21 2.54,10.79 LEDPWR.A 2.54,11.91 8.1,17.46 10.79,17.46 | LED1.A 21.11,28.57 21.11,25.4 LED3.A 20.95,25.4 20.95,22.07 21.11,21.91 LED5.A 21.27,21.75 21.27,20 | SWD_PIN.1 17.78,16.51 18.73,17.46 | 21.27,20 18.73,17.46 | 18.73,17.46 15.72,17.46 | 15.72,17.46 10.79,17.46
  Bottom 0.127: v36.51,20.8 36.51,21.27 IC1.36 | v35.72,28.42 35.08,28.42 IC1.24 | v36.83,7.78 36.83,5.87 37.47,5.24 38.73,5.24 U1.3 | v36.51,12.06 C6.2 | v34.77,14.29 33.5,14.29 C1.1 | v28.89,20 29.37,20 IC1.48 | v29.05,21.75 28.1,21.75 IC1.2
XI7  (via drill 0.3)
  Top 0.127: v23.5,41.75 19.53,41.75 19.53,41.43 Q2.1
  Bottom 0.127: U2.7 19.68,40.64 19.53,40.8 19.53,41.27 Q2.1 | v23.5,41.75 23.5,40.64 C5.1
XI8  (via drill 0.3)
  Top 0.127: v20.95,38.42 18.1,41.27 14.61,41.27 Q2.2
  Bottom 0.127: v20.95,38.42 U2.8 | C8.1 11.75,40.64 12.06,40.96 13.49,40.96 13.81,41.27 14.61,41.27 Q2.2

## Text on the board
tNames: PA1 | PA15 | PA0 | PA2 | PA4 | PA6 | PA8 | PA10 | PA12 | PA14 | VCC | TX1 | PB1 | PB0 | RX1 | PB2 | GND | PB4 | PB6 | PB8 | PB10 | PB12 | PB14 | PB15 | STM32F103C8T6 | v3 | SWO | RESET | VCC | GND | SWCLK | SWDIO